# Altium PCB VESC_POWER_74mm.PcbDoc
Units mm, origin at the board's own origin, x right, y up, seen from the top; angles counter-clockwise.
Board outline 69 x 54 mm, 2 copper layers (Top Layer, Bottom Layer); 50 components, 22 nets, 125 pads, 0 vias.
Unrouted connection lines stored in the file: 66.
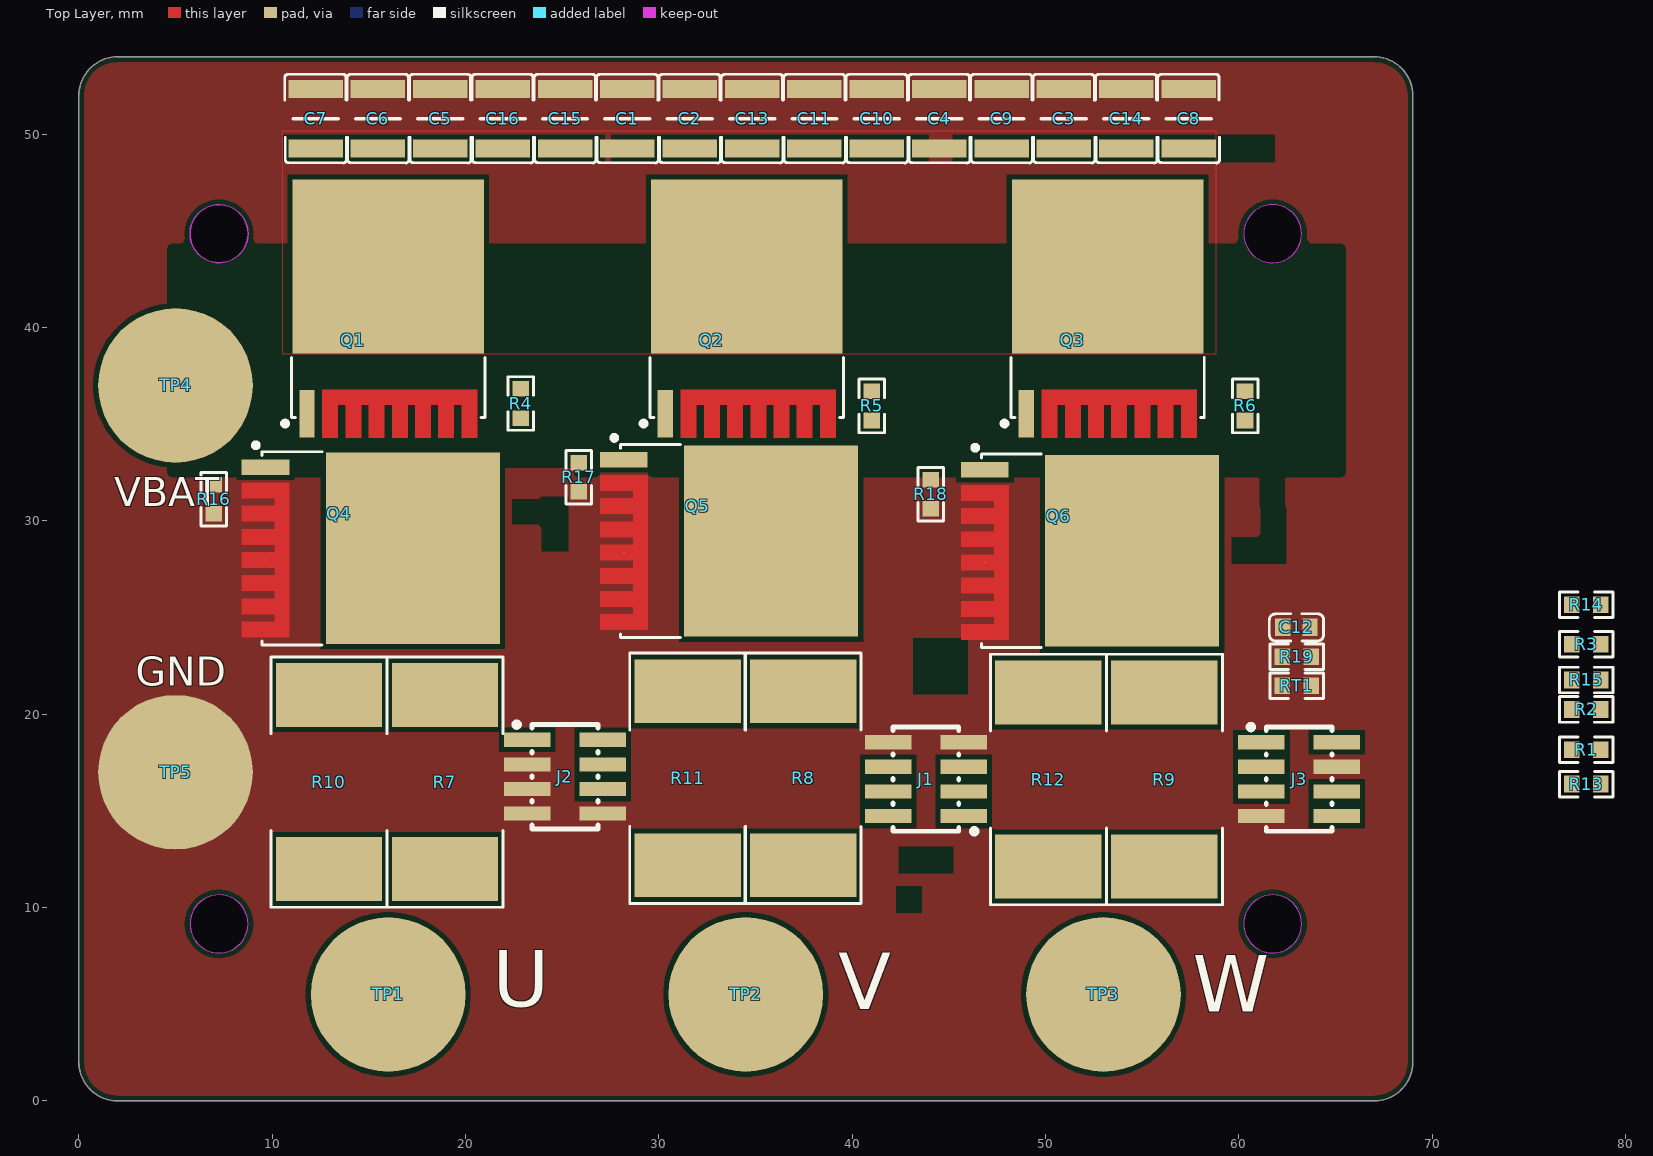
[diagram p0: Top Layer view]
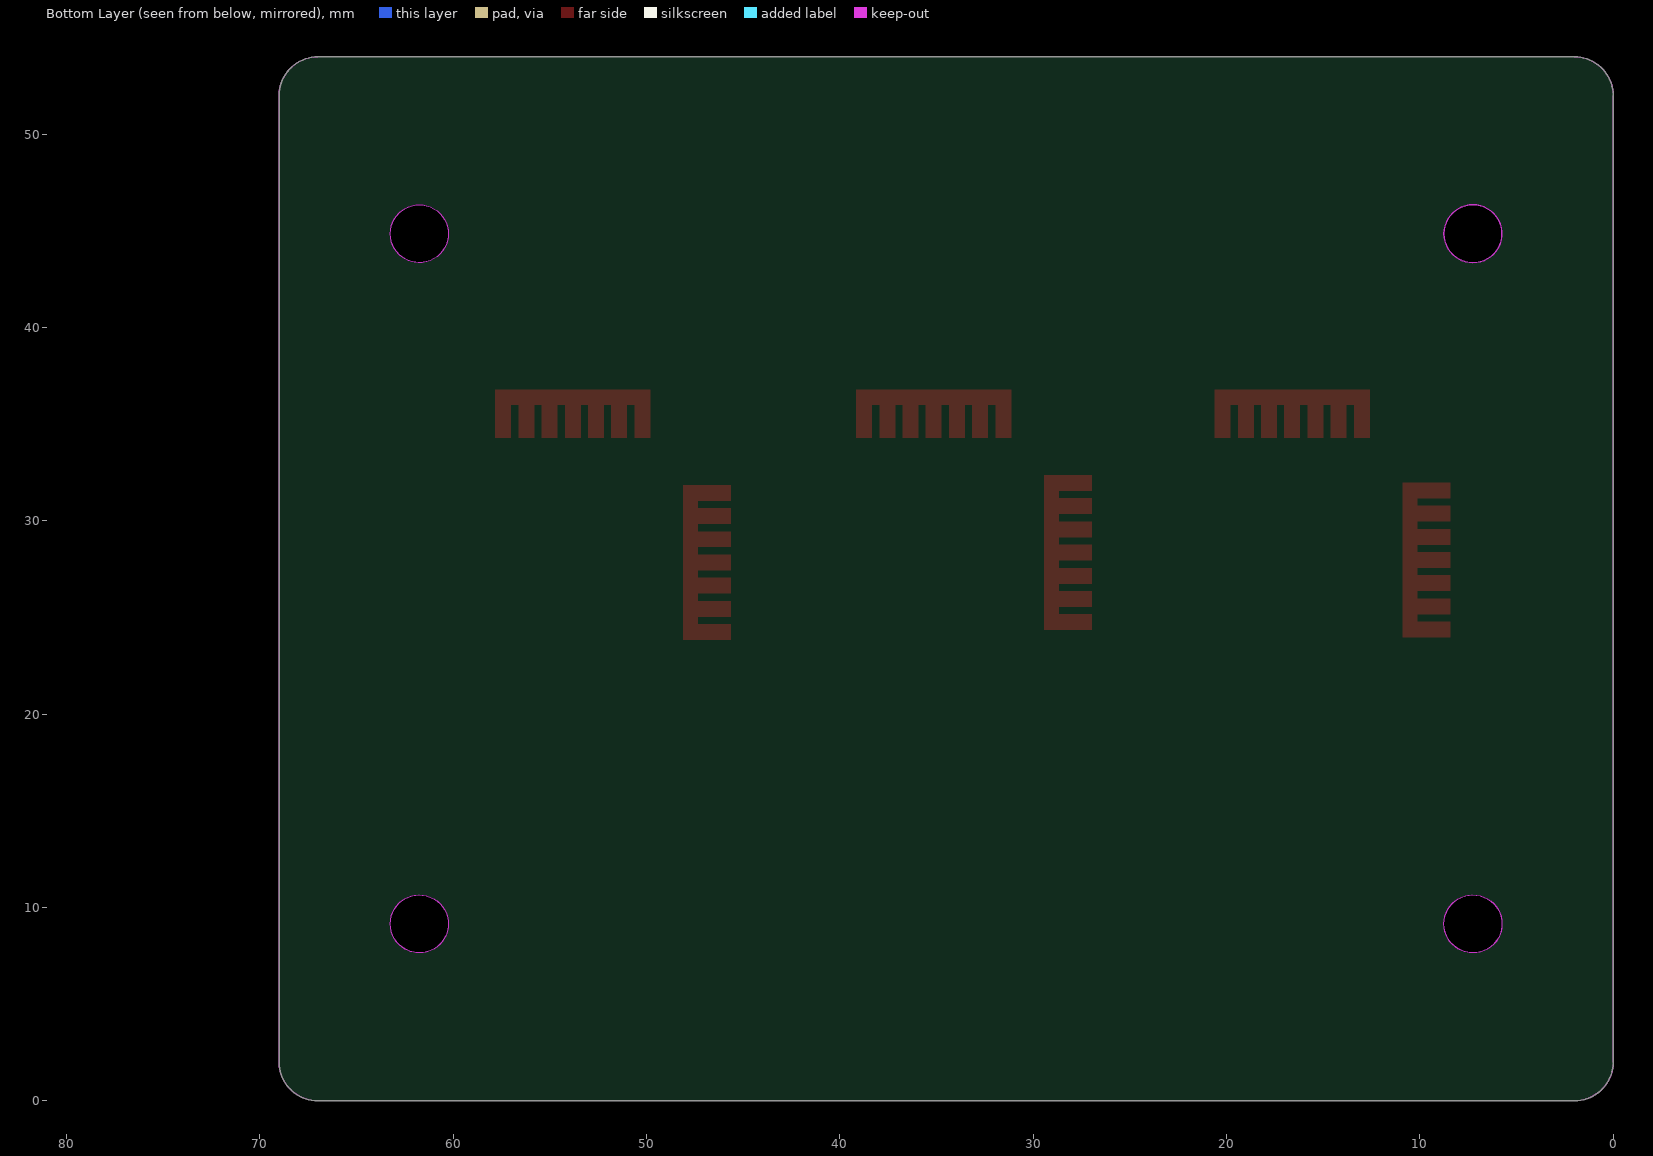
[diagram p1: Bottom Layer view, seen from below]

## Layer stack, top to bottom
Top Solder: solder mask 0.0102, Solder Resist, Dk 3.5
Top Layer: signal copper 0.0356
Dielectric 1: dielectric 0.32, FR-4, Dk 4.8
Bottom Layer: signal copper 0.0356
Bottom Solder: solder mask 0.0102, Solder Resist, Dk 3.5

## Board outline
0,2 ccw(c2,2) 2,0 67,0 ccw(c67,2) 69,2 69,52 ccw(c67,52) 67,54 2,54 ccw(c2,52) 0,52
cut-out: 60.25,44.85 ccw(c61.75,44.85) 61.75,43.35 ccw(c61.75,44.85) 63.25,44.85 ccw(c61.75,44.85) 61.75,46.35 ccw(c61.75,44.85)
cut-out: 60.25,9.15 ccw(c61.75,9.15) 61.75,7.65 ccw(c61.75,9.15) 63.25,9.15 ccw(c61.75,9.15) 61.75,10.65 ccw(c61.75,9.15)
cut-out: 5.75,9.15 ccw(c7.25,9.15) 7.25,7.65 ccw(c7.25,9.15) 8.75,9.15 ccw(c7.25,9.15) 7.25,10.65 ccw(c7.25,9.15)
cut-out: 7.25,43.35 cw(c7.25,44.85) 5.75,44.85 cw(c7.25,44.85) 7.25,46.35 cw(c7.25,44.85) 8.75,44.85 cw(c7.25,44.85)

## Design rules (kind name [scope] priority, off if disabled: settings)
Clearance [All] p1: gap=0.254 ignorepadtopadclearanceinfootprint=FALSE
PolygonConnect [All] p1: connectstyle=Direct reliefconductorwidth=0.254 reliefentries=4 polygonreliefangle="90 Angle" airgapwidth=0.254
RoutingVias [All] p1: holewidth=0.711 width=1.27 viastyle="Through Hole" minholewidth=0.711 minwidth=1.27 maxholewidth=0.711 maxwidth=1.27
SolderMaskExpansion [All] p1: expansion=0.102 istentingtop=FALSE
SupplyNets "Schematic Supply Nets_2" [InNet('GND')] p1: voltage=0.000
SupplyNets "Schematic Supply Nets_1" [InNet('3V3')] p2: voltage=0.000
SupplyNets "Schematic Supply Nets" [InNet('VIN')] p3: voltage=0.000
Width [All] p1: maxlimit=0.254 minlimit=0.254 preferedwidth=0.254
30 further rules are at their usual default settings.

## Components (designator, comment, footprint, x,y, rotation, side; value= is the part's Value field where it differs from the comment)
C1 "2.2uF/100V" CAPC3225X230N 28.374,50.8 r270 top
C2 "2.2uF/100V" CAPC3225X230N 31.599,50.8 r270 top
C3 "2.2uF/100V" CAPC3225X230N 50.953,50.8 r270 top
C4 "2.2uF/100V" CAPC3225X230N 44.502,50.8 r270 top
C5 "2.2uF/100V" CAPC3225X230N 18.697,50.8 r270 top
C6 "2.2uF/100V" CAPC3225X230N 15.472,50.8 r270 top
C7 "2.2uF/100V" CAPC3225X230N 12.246,50.8 r270 top
C8 "2.2uF/100V" CAPC3225X230N 57.404,50.8 r270 top
C9 "2.2uF/100V" CAPC3225X230N 47.727,50.8 r270 top
C10 "2.2uF/100V" CAPC3225X230N 41.276,50.8 r270 top
C11 "2.2uF/100V" CAPC3225X230N 38.051,50.8 r270 top
C12 "2.2uF/6.3V" C0603 62.981,24.489 r180 top
C13 "2.2uF/100V" CAPC3225X230N 34.825,50.8 r270 top
C14 "2.2uF/100V" CAPC3225X230N 54.178,50.8 r270 top
C15 "2.2uF/100V" CAPC3225X230N 25.148,50.8 r270 top
C16 "2.2uF/100V" CAPC3225X230N 21.923,50.8 r270 top
J1 "X6521WVS-2x04H-C60D74" HDR-SMD_8P-P1.27-V-M-C2-C4-LS5.3 43.815,16.637 r90 top
J2 "X6521WVS-2x04H-C60D74" HDR-SMD_8P-P1.27-V-M-C2-C4-LS5.3 25.146,16.764 r270 top
J3 "X6521WVS-2x04H-C60D74" HDR-SMD_8P-P1.27-V-M-C2-C4-LS5.3 63.119,16.637 r270 top
Q1 "NCEP023N10LL" TOLL 16.002,41 r90 top
Q2 "NCEP023N10LL" TOLL 34.544,41 r90 top
Q3 "NCEP023N10LL" TOLL 53.213,41 r90 top
Q4 "NCEP023N10LL" TOLL 15.122,28.575 r0 top
Q5 "NCEP023N10LL" TOLL 33.664,28.956 r0 top
Q6 "NCEP023N10LL" TOLL 52.333,28.448 r0 top
R1 "5.1R/1%" R0603 77.978,18.161 r180 top
R2 "5.1R/1%" R0603 77.978,20.244 r180 top
R3 "5.1R/1%" R0603 77.978,23.622 r0 top
R4 "5.1K/1%" R0603 22.86,36.068 r90 top
R5 "5.1K/1%" R0603 41.021,35.941 r90 top
R6 "5.1K/1%" R0603 60.325,35.941 r90 top
R7 "1mR/1%" R3920 18.936,16.488 r90 top
R8 "1mR/1%" R3920 37.465,16.681 r90 top
R9 "1mR/1%" R3920 56.147,16.62 r90 top
R10 "1mR/1%" R3920 12.936,16.488 r90 top
R11 "1mR/1%" R3920 31.496,16.681 r90 top
R12 "1mR/1%" R3920 50.147,16.62 r90 top
R13 "5.1R/1%" R0603 77.978,16.383 r180 top
R14 "5.1R/1%" R0603 77.978,25.654 r180 top
R15 "5.1R/1%" R0603 77.978,21.768 r0 top
R16 "5.1K/1%" R0603 6.985,31.115 r90 top
R17 "5.1K/1%" R0603 25.863,32.253 r90 top
R18 "5.1K/1%" R0603 44.069,31.369 r90 top
R19 "10K/1%" R0603 63.001,22.963 r0 top
RT1 "NTC" R0603 63.001,21.463 r0 top
TP1 "PHA" TP_8x8 16,5.5 r0 top locked
TP2 "PHB" TP_8X8 34.5,5.5 r0 top locked
TP3 "PHC" TP_8x8 53,5.5 r0 top locked
TP4 "GND" TP_8x8 5,37 r0 top
TP5 "VIN" TP_8x8 5,17 r0 top

## Footprints (in the part's own frame and the unit in brackets; to place one, negate y for a bottom-side part, rotate by r counter-clockwise, add the part's x,y. Pads: shape width x height; smd on the part's side, far side on the other; paste and mask are expansions set on the pad)
C0603 [mm] "C0603"
  rect 0.8x0.9 smd: 1(-0.7,0) 2(0.7,0)
  silkscreen extent -1.41,-0.7 1.4,0.7, body extent -0.8,-0.41 0.8,0.41, height 0.9
CAPC3225X230N [mm]
  rect 0.92x2.82 smd: 1(-1.54,0) 2(1.54,0)
  silkscreen extent -2.3,-1.6 2.28,1.6, body extent -1.6,-1.25 1.6,1.25, height 2.47
HDR-SMD_8P-P1.27-V-M-C2-C4-LS5.3 [mm]
  rect 0.74x2.4 smd paste+0 mask+0.05: 1(-1.905,-1.95) 2(-1.905,1.95) 3(-0.635,-1.95) 4(-0.635,1.95) 5(0.635,-1.95) 6(0.635,1.95) 7(1.905,-1.95) 8(1.905,1.95)
  silkscreen extent -2.84,-2.64 2.69,1.7, body extent -2.54,-2.65 2.54,2.65, height 5.5
R0603 [mm] "R0603"
  rect 0.806x0.864 smd: 1(-0.753,0) 2(0.753,0)
  silkscreen extent -1.38,-0.66 1.39,0.66, body extent -0.79,-0.43 0.79,0.43, height 0.5
R3920 [mm] "R3920"
  rect 3.3x5.5 smd: 1(-4.5,0) 2(4.5,0)
  silkscreen extent -6.48,-3 6.48,3, body extent -5,-2.63 5,2.63, height 1.37
TOLL [mm] "TOLL"
  rect 2.463x0.8 smd: 1(-5.469,4.2)
  rect 9x9.9 smd: 2(2.15,0)
  oct 0.025x0.025 smd: 3(-5.46,-0.6)
  round 0.025 smd: 3(-5.46,-0.6)
  Top Layer region: -6.691,3.4 -4.228,3.4 -4.228,-4.6 -6.691,-4.6 -6.691,-3.8 -4.991,-3.8 -4.991,-3.4 -6.691,-3.4 -6.691,-2.6 -4.991,-2.6 -4.991,-2.2 -6.691,-2.2 -6.691,-1.4 -4.991,-1.4 -4.991,-1 -6.691,-1 -6.691,-0.2 -4.991,-0.2 -4.991,0.2 -6.691,0.2 -6.691,1 -4.991,1 -4.991,1.4 -6.691,1.4 -6.691,2.2 -4.991,2.2 -4.991,2.6 -6.691,2.6
  silkscreen extent -6.1,-5 -2.55,5.46, body extent -6.04,-4.95 5.63,4.95, height 2.3
TP_8x8 [mm] "TP_8X8"
  round 8 smd: 1(0,0)
TP_8X8 [mm] "TP_8X8"
  round 8 smd: 1(0,0)

## Part data
C1 C2 C3 C4 C5 C6 C7 C8 C9 C10 C11 C12 C13 C14 C15 C16: library part "CAP NP"
  C1 C2 C3 C4 C5 C6 C7 C8 C9 C10 C11 C13 C14 C15 C16: PCB Footprint=C1206
  C12: PCB Footprint=C0603
J1 J2 J3: Color=黑色, Current Rating (Max)=3A, JLCPCB Part Class="Extended Part", LCSC Part Name="2x4P 间距:2.54mm 方针", Manufacturer="XKB Connection(中国星坤)", Operating Temperature Range=-40℃~+105℃, Soldering Temperature(Max)=260℃, Voltage Rating (Max)=250V, Add into BOM=yes, Circluar Pins/Square Pins=方针, Contact Material=黄铜, Contact Plating=金, Convert to PCB=yes, Datasheet=https://atta.szlcsc.com/upload/public/pdf/source/20211009/E3239EE5247E6BAFECB8B74A4FCF9AB8.pdf, Device=X6521WVS-2x04H-C60D74, Insulation Height=2.5mm, Length of End Connection Pin=-, Length of Mating Pin=-, Manufacturer Part=X6521WVS-2x04H-C60D74, Mounting Type=-, Number of Pins=8P, Number of Rows=双排, Pin Structure=2x4P, Pitch=2.54mm, Row Spacing=2.54mm, Supplier=LCSC, Supplier Footprint=SMD,P=2.54mm, Supplier Part=C780053, Symbol=X6521WVS-2*04H-C60D74
Q1 Q2 Q3 Q4 Q5 Q6: library part "MOSFET N", PCB Footprint=TOLL
R1 R2 R3 R4 R5 R6 R7 R8 R9 R10 R11 R12 R13 R14 R15 R16 R17 R18 R19: library part RESISTOR
  R1 R2 R3 R4 R5 R6 R13 R14 R15 R16 R17 R18 R19: PCB Footprint=R0603
  R7 R8 R9 R10 R11 R12: PCB Footprint=R3920
TP1 TP2 TP3 TP4 TP5: library part "TEST POINT", PCB Footprint=TP_8x8
RT1: PCB Footprint=R0603

## Nets (pads, with @x,y where several pads share a name; then routed paths per layer and width w, separated by ;. In a path a pad name is that pad's centre, name@x,y a point inside that pad or via, vN(x,y) a via of type N, cw(c..) or ccw(c..) an arc to the next point about the centre after c; other vN are vias at no path point)
3V3: J3.5 RT1.1
ADC_TEMP: C12.1 J3.3 R19.2 RT1.2
GHA: J2.4 R1.1
GHB: J1.4 R2.1
GHC: J1.5 R3.1
GLA: J2.6 R13.1
GLB: J1.6 R14.1
GLC: J1.3 R15.1
GND: C1.1 C2.1 C3.1 C4.1 C5.1 C6.1 C7.1 C8.1 C9.1 C10.1 C11.1 C12.2 C13.1 C14.1 C15.1 C16.1 J1.7 J1.8 J2.3 J2.5 J2.7 J2.8 J3.4 J3.7 Q4.3 Q5.3 Q6.3 R16.1 R17.1 R18.1 R19.1 TP5.1
NetQ1_1: Q1.1 R1.2 R4.2
NetQ2_1: Q2.1 R2.2 R5.2
NetQ3_1: Q3.1 R3.2 R6.2
NetQ4_1: Q4.1 R13.2 R16.2
NetQ5_1: Q5.1 R14.2 R17.2
NetQ6_1: Q6.1 R15.2 R18.2
PHA: J2.1 R7.1 R10.1 TP1.1
PHB: J1.1 R8.1 R11.1 TP2.1
PHC: J3.1 R9.1 R12.1 TP3.1
SHA: J2.2 Q1.3 Q4.2 R4.1 R7.2 R10.2
SHB: J1.2 Q2.3 Q5.2 R5.1 R8.2 R11.2
SHC: J3.2 Q3.3 Q6.2 R6.1 R9.2 R12.2
VIN: C1.2 C2.2 C3.2 C4.2 C5.2 C6.2 C7.2 C8.2 C9.2 C10.2 C11.2 C13.2 C14.2 C15.2 C16.2 J3.6 J3.8 Q1.2 Q2.2 Q3.2 TP4.1

## Polygon pours and split planes (outlines as drawn)
GND on Top Layer "GND_L01_P008" (solid, pour order 8): 0,2 ccw(c2,2) 2,0 67,0 ccw(c67,2) 69,2 69,52 ccw(c67,52) 67,54 2,54 ccw(c2,52) 0,52
VIN on Top Layer "VIN_L01_P003" (solid, pour order 3): 10.546,38.608 10.546,50.165 58.796,50.165 58.796,38.608

## Keep-outs
Keep-Out Layer:
  circle w0.013: c61.75,44.85 r1.5
  circle w0.013: c61.75,9.15 r1.5
  circle w0.013: c7.25,9.15 r1.5
  circle w0.013: c7.25,44.85 r1.5
  lines w0.025: 0,2 ccw(c2,2) 2,0 67,0 ccw(c67,2) 69,2 69,52 ccw(c67,52) 67,54 2,54 ccw(c2,52) 0,52 0,2

## Silkscreen, mask and mechanical layers (free items; w line width, h text height)
Top Overlay:
  text "VBAT" at 1.823,30.746 h1.5
  text "GND" at 2.954,21.475 h1.5
  text "U" at 21.415,3.903 h5
  text "V" at 39.268,3.776 h5
  text "W" at 57.608,3.649 h5
Mechanical 6:
  lines w0.025: -0.635,0 0.635,0 ; 0,-0.635 0,0.635

## Text inside footprints (layer, text, board x,y; h text height)
C12: Mechanical 8 "1" at 63.935,24.489 h0.64 r180; Mechanical 8 "2" at 62.535,24.489 h0.64 r180
Q1: Mechanical 8 "2" at 16.764,43.15 h0.64 r180; Mechanical 8 "3" at 16.394,35.05 h0.64 r90; Mechanical 8 "1" at 11.594,35.15 h0.64 r90
Q2: Mechanical 8 "2" at 35.306,43.15 h0.64 r180; Mechanical 8 "3" at 34.936,35.05 h0.64 r90; Mechanical 8 "1" at 30.136,35.15 h0.64 r90
Q3: Mechanical 8 "1" at 48.805,35.15 h0.64 r90; Mechanical 8 "3" at 53.605,35.05 h0.64 r90; Mechanical 8 "2" at 53.975,43.15 h0.64 r180
Q4: Mechanical 8 "2" at 17.272,27.813 h0.64 r90; Mechanical 8 "3" at 9.172,28.183 h0.64; Mechanical 8 "1" at 9.272,32.983 h0.64
Q5: Mechanical 8 "1" at 27.814,33.364 h0.64; Mechanical 8 "3" at 27.714,28.564 h0.64; Mechanical 8 "2" at 35.814,28.194 h0.64 r90
Q6: Mechanical 8 "1" at 46.483,32.856 h0.64; Mechanical 8 "3" at 46.383,28.056 h0.64; Mechanical 8 "2" at 54.483,27.686 h0.64 r90
R1: Mechanical 8 "2" at 76.47,18.361 h0.64 r180; Mechanical 8 "1" at 78.07,18.361 h0.64 r180
R2: Mechanical 8 "2" at 76.47,20.444 h0.64 r180; Mechanical 8 "1" at 78.07,20.444 h0.64 r180
R3: Mechanical 8 "1" at 77.886,23.422 h0.64; Mechanical 8 "2" at 79.486,23.422 h0.64
R4: Mechanical 8 "2" at 23.06,37.576 h0.64 r90; Mechanical 8 "1" at 23.06,35.976 h0.64 r90
R5: Mechanical 8 "1" at 41.221,35.849 h0.64 r90; Mechanical 8 "2" at 41.221,37.449 h0.64 r90
R6: Mechanical 8 "2" at 60.525,37.449 h0.64 r90; Mechanical 8 "1" at 60.525,35.849 h0.64 r90
R7: Mechanical 8 "1" at 18.528,12.188 h0.64 r90; Mechanical 8 "2" at 18.528,21.188 h0.64 r90
R8: Mechanical 8 "2" at 37.057,21.381 h0.64 r90; Mechanical 8 "1" at 37.057,12.381 h0.64 r90
R9: Mechanical 8 "1" at 55.739,12.32 h0.64 r90; Mechanical 8 "2" at 55.739,21.32 h0.64 r90
R10: Mechanical 8 "2" at 12.528,21.188 h0.64 r90; Mechanical 8 "1" at 12.528,12.188 h0.64 r90
R11: Mechanical 8 "1" at 31.088,12.381 h0.64 r90; Mechanical 8 "2" at 31.088,21.381 h0.64 r90
R12: Mechanical 8 "2" at 49.739,21.32 h0.64 r90; Mechanical 8 "1" at 49.739,12.32 h0.64 r90
R13: Mechanical 8 "1" at 78.07,16.583 h0.64 r180; Mechanical 8 "2" at 76.47,16.583 h0.64 r180
R14: Mechanical 8 "2" at 76.47,25.854 h0.64 r180; Mechanical 8 "1" at 78.07,25.854 h0.64 r180
R15: Mechanical 8 "1" at 77.886,21.568 h0.64; Mechanical 8 "2" at 79.486,21.568 h0.64
R16: Mechanical 8 "2" at 7.185,32.623 h0.64 r90; Mechanical 8 "1" at 7.185,31.023 h0.64 r90
R17: Mechanical 8 "1" at 26.063,32.161 h0.64 r90; Mechanical 8 "2" at 26.063,33.761 h0.64 r90
R18: Mechanical 8 "2" at 44.269,32.877 h0.64 r90; Mechanical 8 "1" at 44.269,31.277 h0.64 r90
R19: Mechanical 8 "1" at 62.909,22.763 h0.64; Mechanical 8 "2" at 64.509,22.763 h0.64
RT1: Mechanical 8 "1" at 62.909,21.263 h0.64; Mechanical 8 "2" at 64.509,21.263 h0.64
TP1: Mechanical 8 "1" at 14.222,5.5 h0.64
TP2: Mechanical 8 "1" at 32.722,5.5 h0.64
TP3: Mechanical 8 "1" at 51.222,5.5 h0.64
TP4: Mechanical 8 "1" at 3.222,37 h0.64
TP5: Mechanical 8 "1" at 3.222,17 h0.64